# Altium PCB LdcPower.PcbDoc
Units mm, origin at the board's own origin, x right, y up, seen from the top; angles counter-clockwise.
Board outline 73.64 x 77.31 mm, 2 copper layers (Top Layer, Bottom Layer); 81 components, 38 nets, 243 pads, 156 vias.
Unrouted connection lines stored in the file: 40.
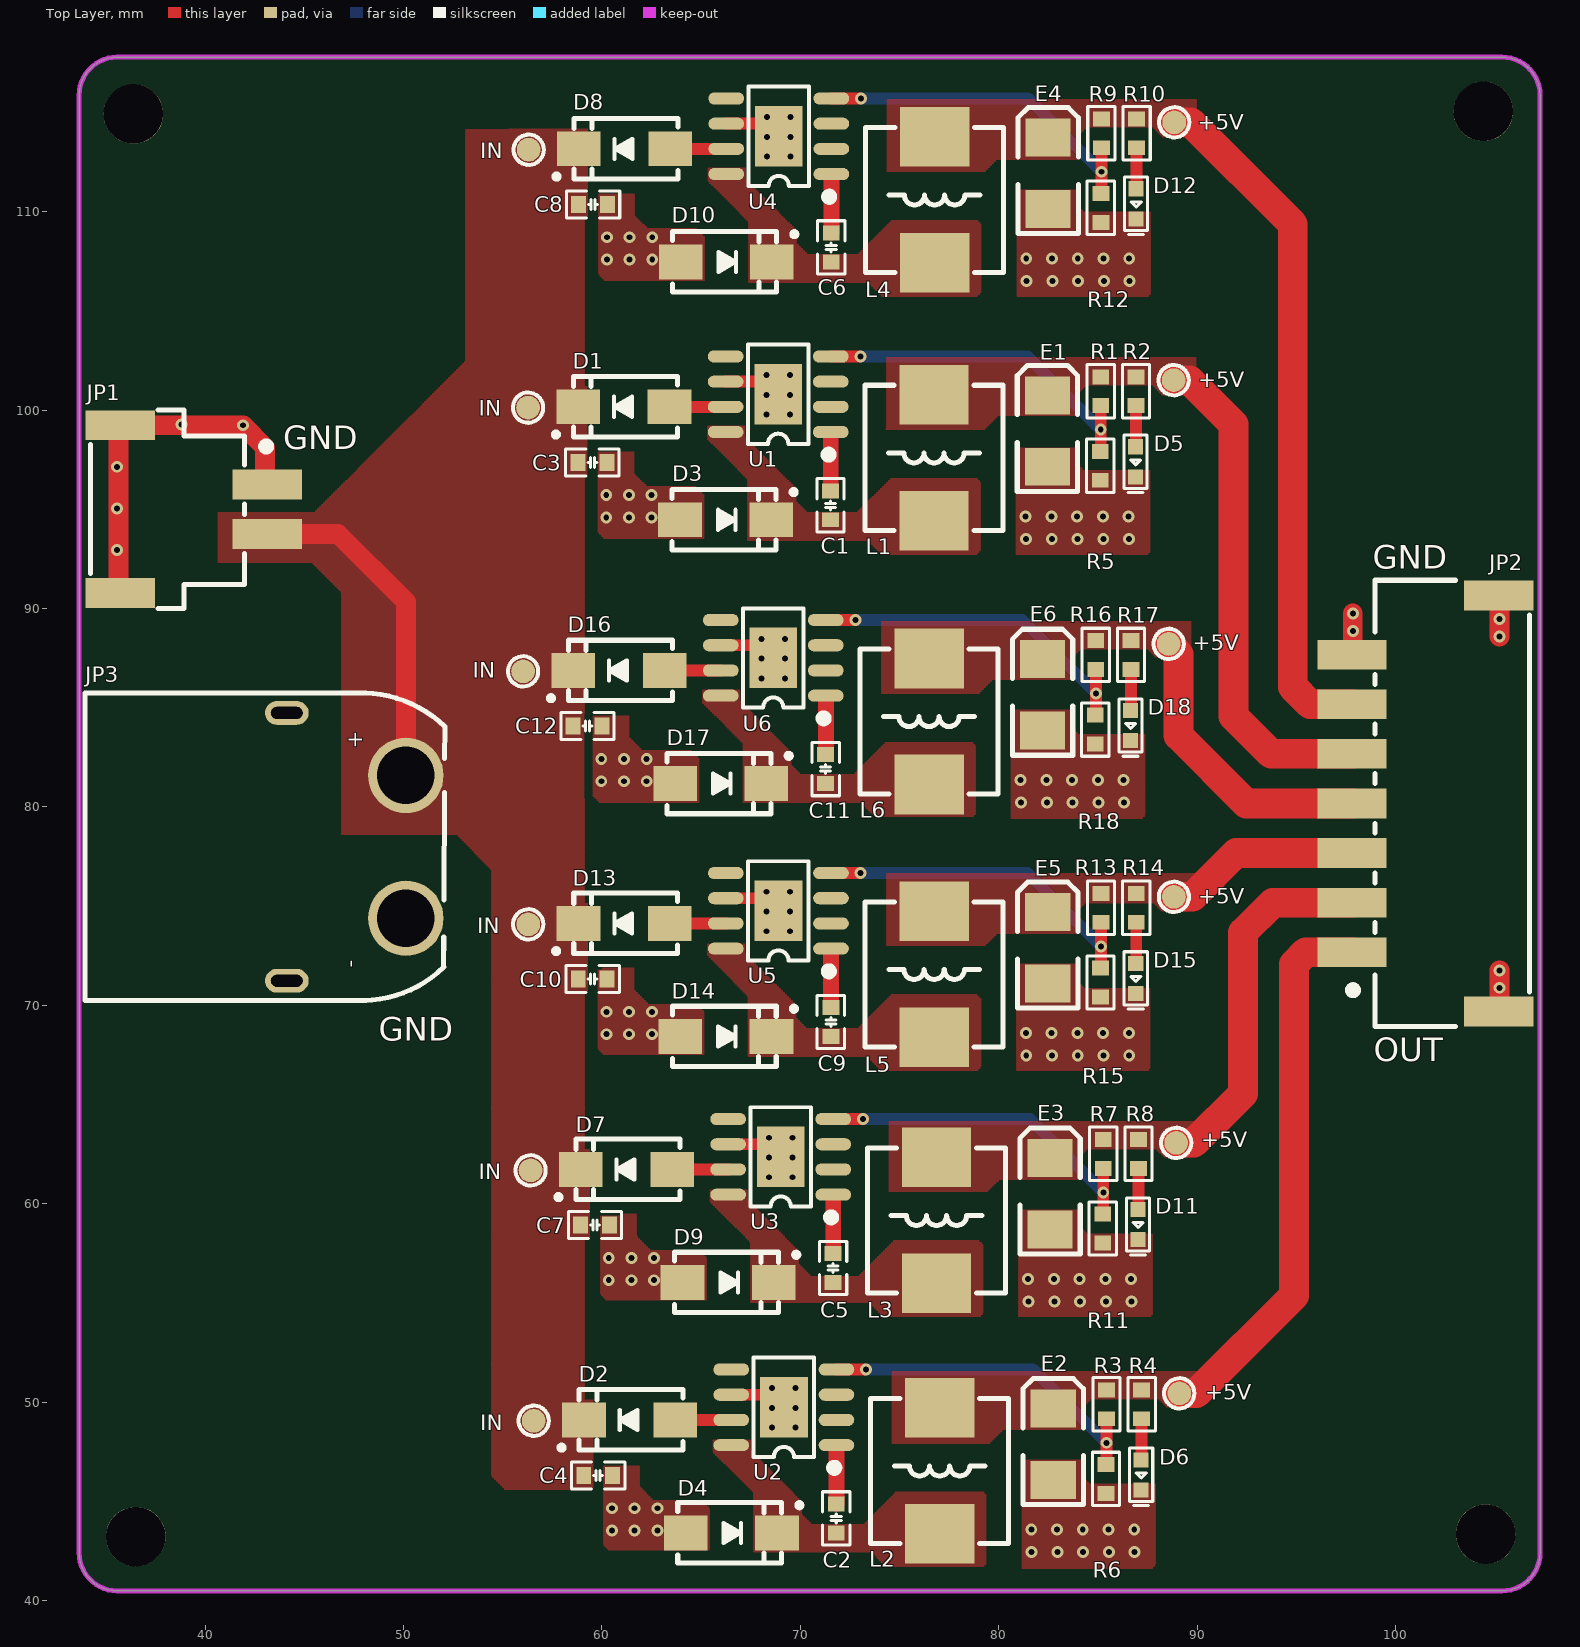
[diagram p0: Top Layer view]
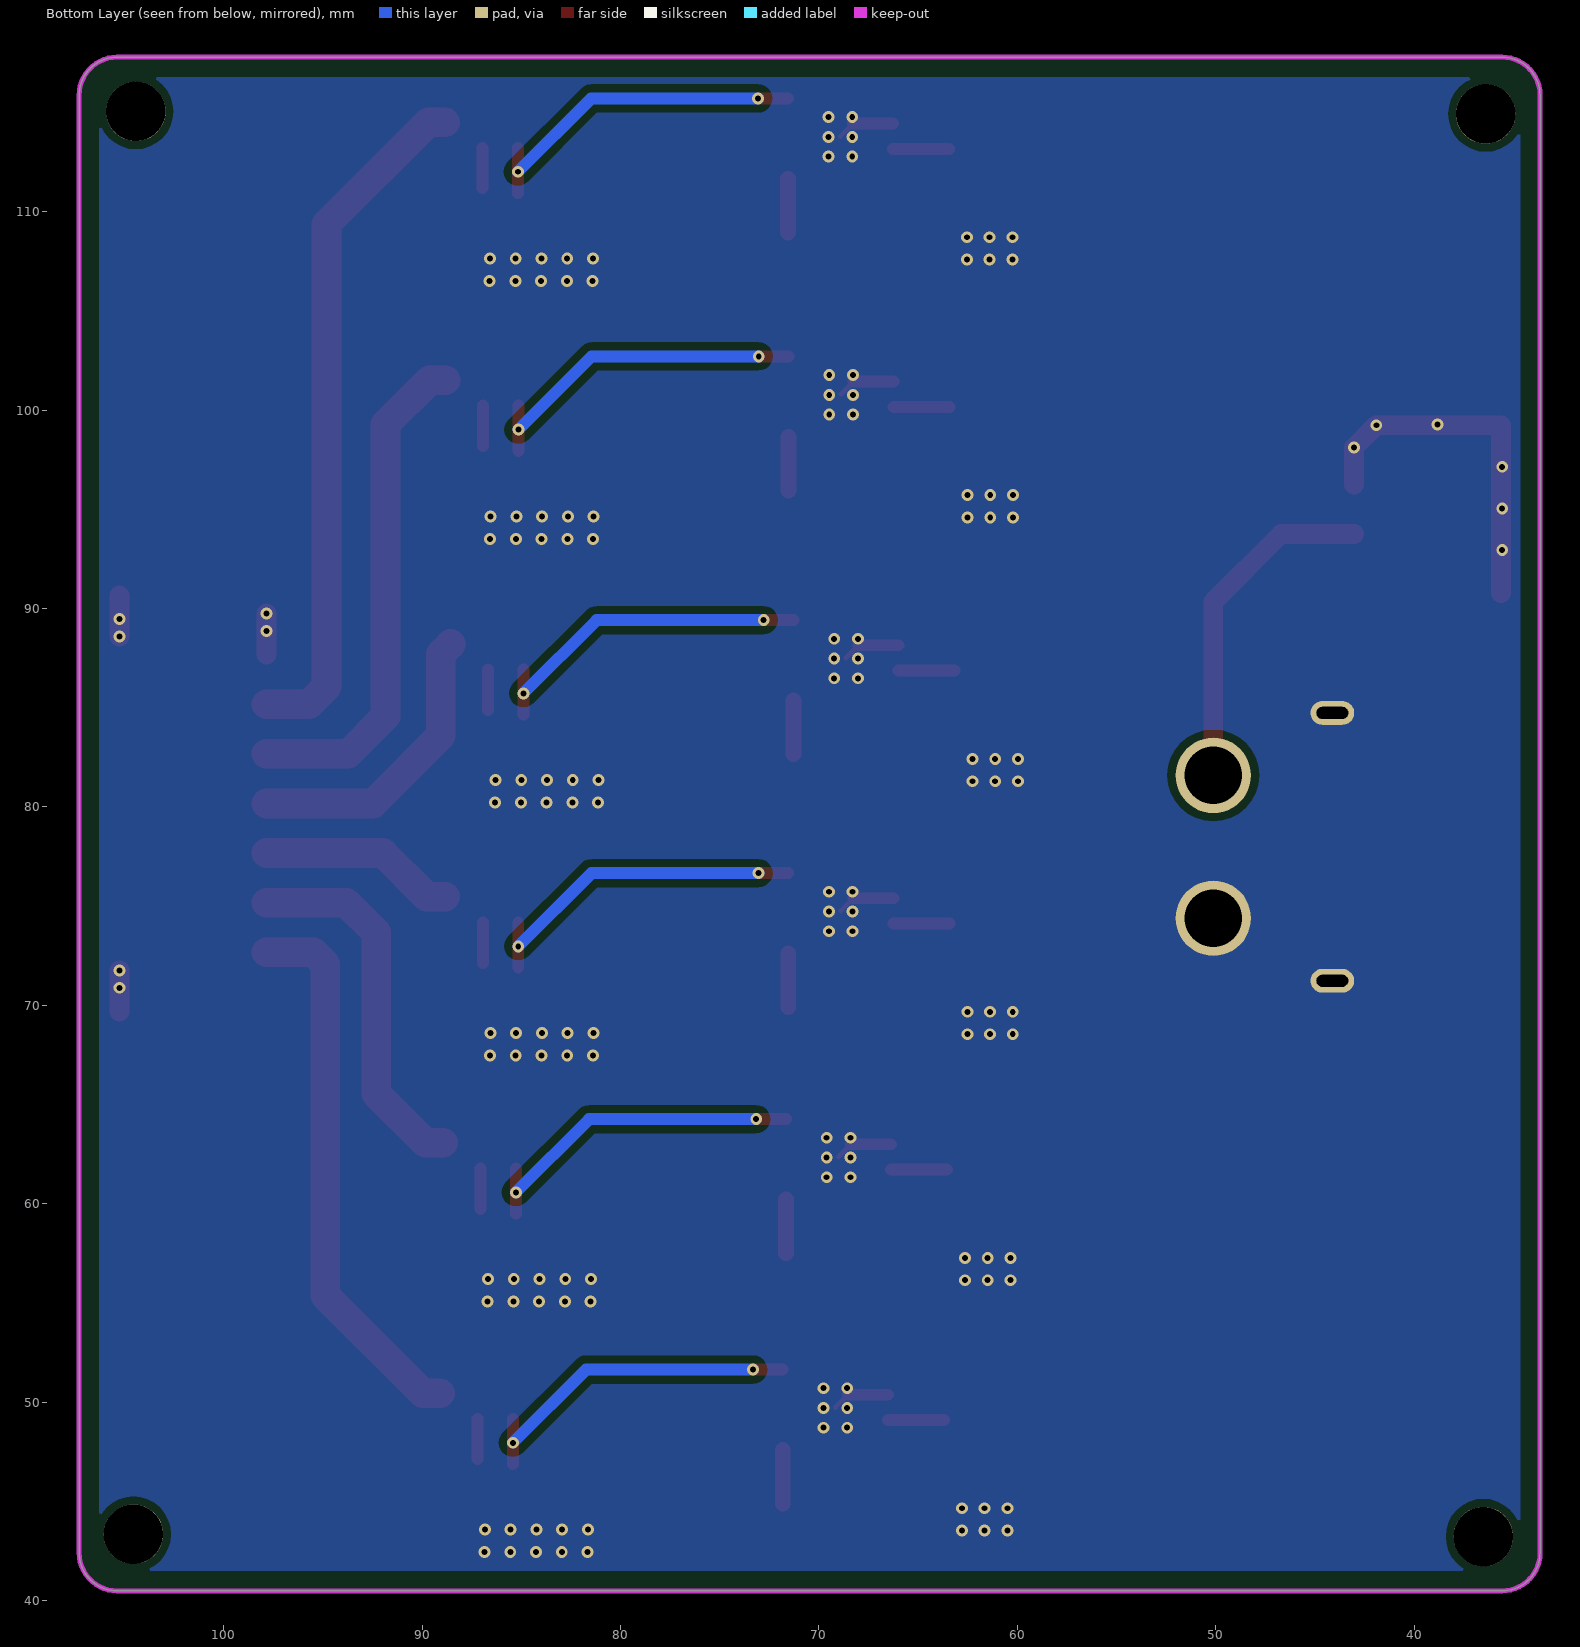
[diagram p1: Bottom Layer view, seen from below]
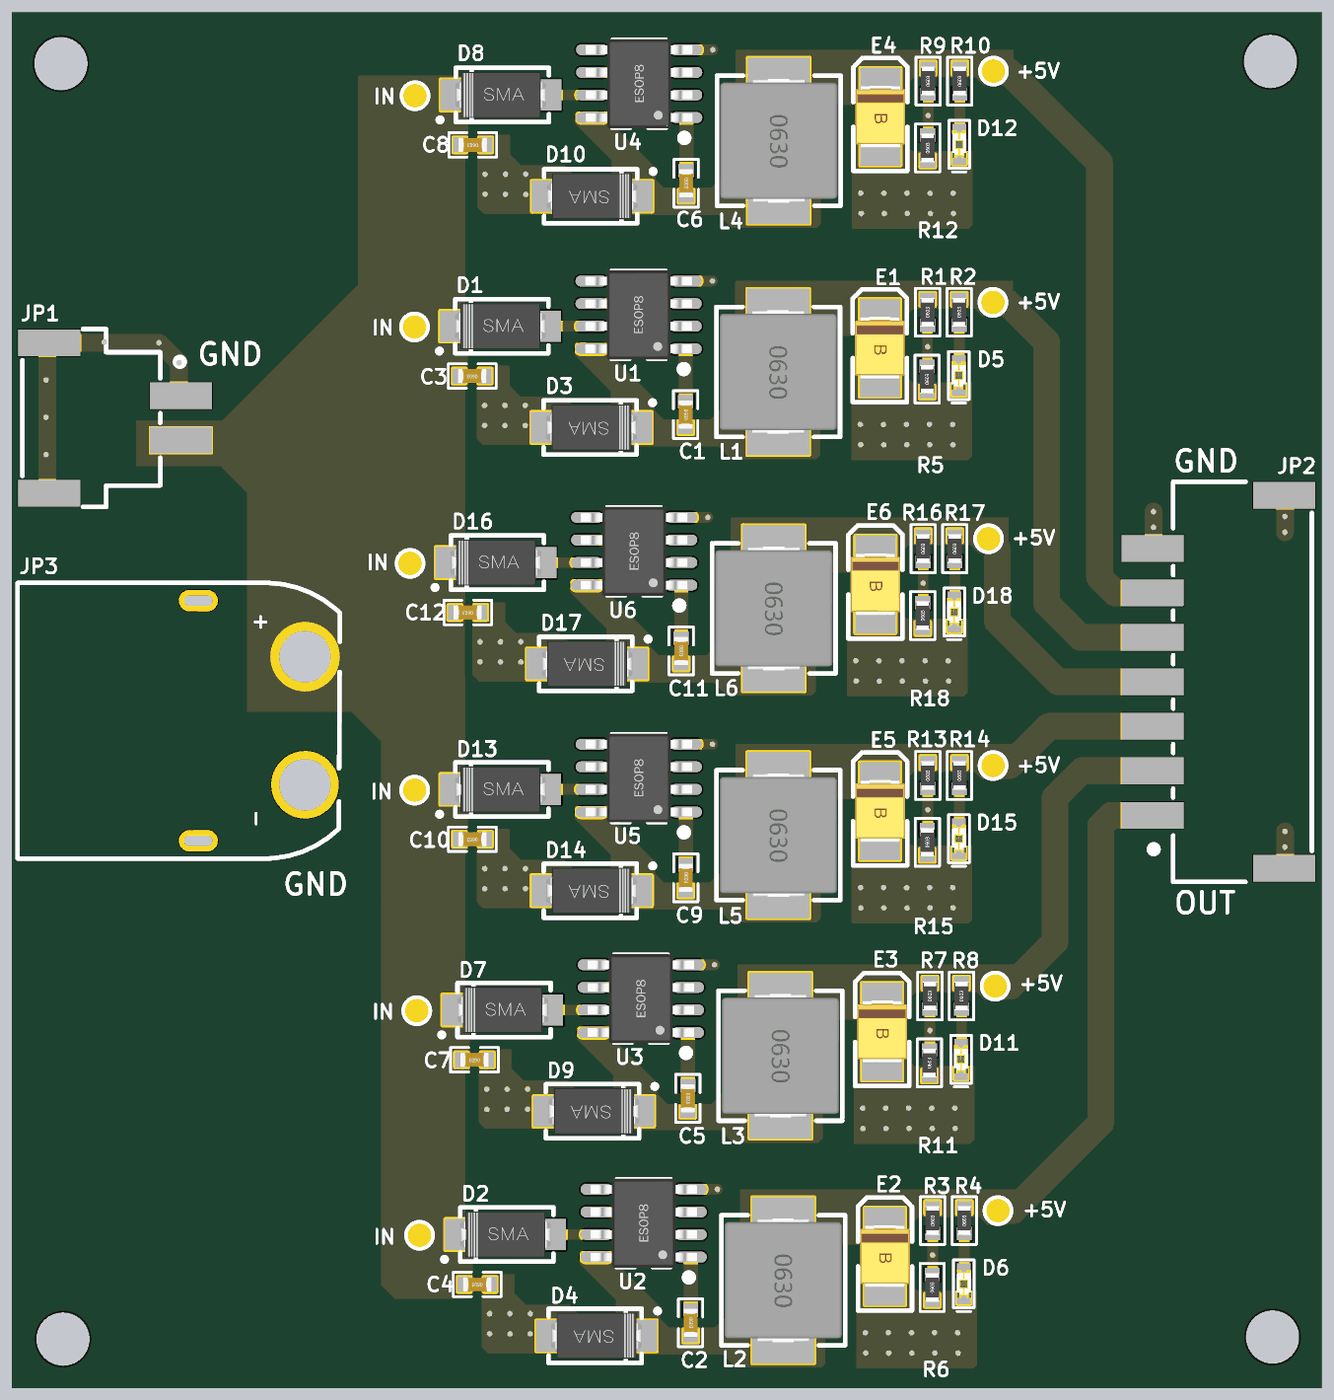
[diagram p2: 3D render of the assembled board from above, using the file's embedded part models]

## Layer stack, top to bottom
Top Solder: solder mask 0.0102, Solder Resist, Dk 3.5
Top Layer: signal copper 0.0356
Dielectric 1: dielectric 0.32, FR-4, Dk 4.8
Bottom Layer: signal copper 0.0356
Bottom Solder: solder mask 0.0102, Solder Resist, Dk 3.5

## Board outline
35.57,40.48 cw(c35.57,42.4) 33.65,42.4 33.65,115.87 33.651,115.87 cw(c35.57,115.87) 35.57,117.79 105.37,117.79 105.371,117.79 cw(c105.371,115.87) 107.29,115.87 107.29,42.4 cw(c105.37,42.4) 105.37,40.48

## Design rules (kind name [scope] priority, off if disabled: settings)
BoardOutlineClearance [All] p1: gap=1 ignorepadtopadclearanceinfootprint=FALSE
Clearance [All] p1: gap=0.2 ignorepadtopadclearanceinfootprint=TRUE except(0.4: Arc-Fill Arc-Poly Arc-Region Track-Fill Track-Poly Track-Region SMDPad-Fill SMDPad-Poly SMDPad-Region THPad-Fill THPad-Poly THPad-Region Fill-Fill Fill-Poly Fill-Region Poly-Poly Poly-Region Region-Region)
PolygonConnect [All] p1: connectstyle=Direct reliefconductorwidth=0.254 reliefentries=4 polygonreliefangle="90 Angle" airgapwidth=0.254
RoutingVias [All] p1: holewidth=0.711 width=1.27 viastyle="Through Hole" minholewidth=0.711 minwidth=1.27 maxholewidth=0.711 maxwidth=1.27
SolderMaskExpansion [All] p1: expansion=0.102 istentingtop=FALSE
Width [All] p1: maxlimit=0.254 minlimit=0.254 preferedwidth=0.254
30 further rules are at their usual default settings.

## Classes and differential pairs
component class "Room Definition 6": +5V C6 C8 D8 D10 D12 E4 IN L4 R9 R10 R12 U4
component class "Room Definition 5": +5V C1 C3 D1 D3 D5 E1 IN L1 R1 R2 R5 U1
component class "Room Definition 4": +5V C11 C12 D16 D17 D18 E6 IN L6 R16 R17 R18 U6
component class "Room Definition 3": +5V C9 C10 D13 D14 D15 E5 IN L5 R13 R14 R15 U5
component class "Room Definition 2": +5V C5 C7 D7 D9 D11 E3 IN L3 R7 R8 R11 U3
component class "Room Definition 1": +5V C2 C4 D2 D4 D6 E2 IN L2 R3 R4 R6 U2
component class LdcPower: C1 C2 C3 C4 C5 C6 C7 C8 C9 C10 C11 C12 D1 D2 D3 D4 D5 D6 D7 D8 D9 D10 D11 D12 D13 D14 D15 D16 D17 D18 E1 E2 E3 E4 E5 E6 L1 L2 L3 L4 L5 L6 R1 R2 R3 R4 R5 R6 R7 R8 R9 R10 R11 R12 R13 R14 R15 R16 R17 R18 U1 U2 U3 U4 U5 U6

## Components (designator, comment, footprint, x,y, rotation, side; value= is the part's Value field where it differs from the comment)
+5V "CS" "TEST 1.2" 88.57,88.214 r90 top (schematic designator *11)
+5V "CS" "TEST 1.2" 88.83,75.464 r90 top (schematic designator *9)
+5V "CS" "TEST 1.2" 88.85,114.504 r90 top (schematic designator *6)
+5V "CS" "TEST 1.2" 88.948,63.064 r90 top (schematic designator *5)
+5V "CS" "TEST 1.2" 89.104,50.441 r90 top (schematic designator *2)
+5V "CS" "TEST 1.2" 88.82,101.504 r90 top (schematic designator *1)
C1 "103" C0603_L 71.53,95.195 r270 top
C2 "103" C0603_L 71.814,44.131 r270 top
C3 "106" C0603_L 59.525,97.36 r180 top
C4 "106" C0603_L 59.809,46.296 r180 top
C5 "103" C0603_L 71.658,56.755 r270 top
C6 "103" C0603_L 71.56,108.195 r270 top
C7 "106" C0603_L 59.652,58.92 r180 top
C8 "106" C0603_L 59.555,110.36 r180 top
C9 "103" C0603_L 71.54,69.155 r270 top
C10 "106" C0603_L 59.535,71.32 r180 top
C11 "103" C0603_L 71.28,81.905 r270 top
C12 "106" C0603_L 59.275,84.07 r180 top
D1 "B340A" SMA 61.112,100.163 r180 top
D2 "B340A" SMA 61.396,49.099 r180 top
D3 "B340A" SMA 66.24,94.466 r0 top
D4 "B340A" SMA 66.524,43.402 r0 top
D5 "LED" LED0603_R 86.898,97.39 r270 top
D6 "LED" LED0603_R 87.182,46.326 r270 top
D7 "B340A" SMA 61.239,61.723 r180 top
D8 "B340A" SMA 61.142,113.163 r180 top
D9 "B340A" SMA 66.367,56.026 r0 top
D10 "B340A" SMA 66.27,107.466 r0 top
D11 "LED" LED0603_R 87.026,58.95 r270 top
D12 "LED" LED0603_R 86.928,110.39 r270 top
D13 "B340A" SMA 61.122,74.123 r180 top
D14 "B340A" SMA 66.25,68.426 r0 top
D15 "LED" LED0603_R 86.908,71.35 r270 top
D16 "B340A" SMA 60.862,86.873 r180 top
D17 "B340A" SMA 65.99,81.176 r0 top
D18 "LED" LED0603_R 86.648,84.1 r270 top
E1 "220uF/6.3V" C_3528 82.46,98.939 r270 top
E2 "220uF/6.3V" C_3528 82.744,47.875 r270 top
E3 "220uF/6.3V" C_3528 82.588,60.499 r270 top
E4 "220uF/6.3V" C_3528 82.49,111.939 r270 top
E5 "220uF/6.3V" C_3528 82.47,72.899 r270 top
E6 "220uF/6.3V" C_3528 82.21,85.649 r270 top
IN "CS" "TEST 1.2" 56.03,86.83 r0 top (schematic designator *12)
IN "CS" "TEST 1.2" 56.29,74.08 r0 top (schematic designator *10)
IN "CS" "TEST 1.2" 56.31,113.12 r0 top (schematic designator *8)
IN "CS" "TEST 1.2" 56.407,61.68 r0 top (schematic designator *7)
IN "CS" "TEST 1.2" 56.564,49.056 r0 top (schematic designator *4)
IN "CS" "TEST 1.2" 56.28,100.12 r0 top (schematic designator *3)
JP1 "HDR-1X2" CONN-SMD_2P-P2.54_MEGASTAR_ZX-XH2.54-2PWT 39.429,95.002 r270 top (schematic designator JP3)
JP2 "HDR-1X7" CONN-SMD_7P-P2.54_MEGASTAR_ZX-XH2.54-7PWT 101.51,80.17 r90 top
JP3 "HDR-1X2" CONN-TH_XT60PW-M 47.121,77.984 r0 top (schematic designator JP1)
L1 "15uH" L-SMD-0630 76.74,97.591 r270 top
L2 "15uH" L-SMD-0630 77.024,46.528 r270 top
L3 "15uH" L-SMD-0630 76.867,59.151 r270 top
L4 "15uH" L-SMD-0630 76.77,110.591 r270 top
L5 "15uH" L-SMD-0630 76.75,71.551 r270 top
L6 "15uH" L-SMD-0630 76.49,84.301 r270 top
R1 "10K" R0603_L 85.146,100.946 r90 top
R2 "1K" R0603_L 86.924,100.946 r90 top
R3 "10K" R0603_L 85.43,49.882 r90 top
R4 "1K" R0603_L 87.208,49.882 r90 top
R5 "3.24K" R0603_L 85.12,97.186 r90 top
R6 "3.24K" R0603_L 85.404,46.123 r90 top
R7 "10K" R0603_L 85.273,62.506 r90 top
R8 "1K" R0603_L 87.051,62.506 r90 top
R9 "10K" R0603_L 85.176,113.946 r90 top
R10 "1K" R0603_L 86.954,113.946 r90 top
R11 "3.24K" R0603_L 85.248,58.746 r90 top
R12 "3.24K" R0603_L 85.15,110.186 r90 top
R13 "10K" R0603_L 85.156,74.906 r90 top
R14 "1K" R0603_L 86.934,74.906 r90 top
R15 "3.24K" R0603_L 85.13,71.146 r90 top
R16 "10K" R0603_L 84.896,87.656 r90 top
R17 "1K" R0603_L 86.674,87.656 r90 top
R18 "3.24K" R0603_L 84.87,83.896 r90 top
U1 "TPS5430DDAR" SOIC-8_EP 68.888,100.798 r180 top
U2 "TPS5430DDAR" SOIC-8_EP 69.172,49.734 r180 top
U3 "TPS5430DDAR" SOIC-8_EP 69.016,62.358 r180 top
U4 "TPS5430DDAR" SOIC-8_EP 68.918,113.798 r180 top
U5 "TPS5430DDAR" SOIC-8_EP 68.898,74.758 r180 top
U6 "TPS5430DDAR" SOIC-8_EP 68.638,87.508 r180 top

## Footprints (in the part's own frame and the unit in brackets; to place one, negate y for a bottom-side part, rotate by r counter-clockwise, add the part's x,y. Pads: shape width x height; smd on the part's side, far side on the other; paste and mask are expansions set on the pad)
C0603_L [mm] "贴片MLCC电容"
  rect 0.75x0.85 smd: 1(-0.725,0) 2(0.725,0)
  silkscreen extent -1.35,-0.69 1.35,0.69, body extent -0.8,-0.4 0.8,0.4, height 0.8
C_3528 [mil]
  rect 75x90 smd: 1(-70.87,-0.01) 2(70.86,-0.01)
  silkscreen extent -130,-60 120,60, body extent -69,-55 69,55, height 76
CONN-SMD_2P-P2.54_MEGASTAR_ZX-XH2.54-2PWT [mm]
  rect 1.5x3.5 smd paste+0 mask+0.05: 1(-1.25,3.7) 2(1.25,3.7) 3(-4.23,-3.7) 4(4.23,-3.7)
  silkscreen extent -5,-5.21 5,3.85
CONN-SMD_7P-P2.54_MEGASTAR_ZX-XH2.54-7PWT [mm]
  rect 1.5x3.5 smd paste+0 mask+0.05: 1(-7.5,3.7) 2(-5,3.7) 3(-2.5,3.7) 4(0,3.7) 5(2.5,3.7) 6(5,3.7) 7(7.5,3.7) 8(10.48,-3.7) 9(-10.48,-3.7)
  silkscreen extent -11.25,-5.25 11.25,3.85
CONN-TH_XT60PW-M [mm]
  round 3.8 hole 2.9 paste+0 mask+0.05: 1(3,-3.6) 2(3,3.6)
  oval 2.2x1.2 hole 0.6 slot 1.6 at 0 deg paste+0 mask+0.05: 3(-3,6.75) 4(-3,-6.75)
  silkscreen extent -13.17,-7.75 4.96,7.75
L-SMD-0630 [mm]
  rect 3x3.5 smd: 1(-3.175,0) 2(3.175,0)
  silkscreen extent -3.66,-3.48 3.66,3.48, body extent -3.47,-3.3 3.48,3.3
LED0603_R [mil] "红色0603LED"
  rect 30x30 smd: 1(-30,0) 2(30,0)
  silkscreen extent -53,-23 61,23, body extent -31,-16 32,16, height 18
R0603_L [mm] "1/10W贴片电阻"
  rect 0.75x0.85 smd: 1(-0.725,0) 2(0.725,0)
  silkscreen extent -1.35,-0.69 1.35,0.69, body extent -0.8,-0.4 0.8,0.4, height 0.4
SMA [mm]
  rect 2.2x1.75 smd: 1(-2.3,0) 2(2.3,0)
  silkscreen extent -2.7,-1.52 3.56,1.52, body extent -2.55,-1.3 2.55,1.3, height 2.15
SOIC-8_EP [mm]
  oval 1.8x0.61 smd: 1(-2.65,1.905) 2(-2.65,0.635) 3(-2.65,-0.635) 4(-2.65,-1.905) 5(2.65,-1.905) 6(2.65,-0.635) 7(2.65,0.635) 8(2.65,1.905)
  rect 2.413x3.048 smd paste-2: 9(0,0)
  rect 0.9x0.7 on Top Paste: 10(-0.625,1.1) 10(-0.625,0) 10(-0.625,-1.1) 11(0.65,1.1) 11(0.65,0) 11(0.65,-1.1)
  silkscreen extent -2.69,-2.5 1.52,3.2, body extent -3,-2.5 3,2.5, height 1.53
"TEST 1.2" [mm]
  round 1.2 smd paste-1.2: 1(0,0)
  silkscreen extent -0.76,-0.76 0.76,0.76

## Part data
+5V +5V +5V +5V +5V +5V IN IN IN IN IN IN: "探针焊盘", BOM名称=?
C1 C2 C3 C4 C5 C6 C7 C8 C9 C10 C11 C12: library part C, "贴片电容/MLCC电容", BOM名称=无
D1 D2 D3 D4 D7 D8 D9 D10 D13 D14 D16 D17: library part D-Schottky, "肖特基二极管", 当前库版本V2023.10.25 @淘宝卖家:黄晶宝石=最新版本发布https://ite
D5 D6 D11 D12 D15 D18: library part LED0, "发光二极管", LatestRevisionDate=08-Jul-2005, LatestRevisionNote="Mech Layer 1 removed.", PackageReference=LED-0, Published=8-Jun-2000, Publisher="Altium Limited"
E1 E2 E3 E4 E5 E6: library part CT, "贴片钽电容", BOM名称=?, 当前库版本V2023.10.25 @淘宝卖家:黄晶宝石=最新版本发布https://ite
JP1 JP3: library part "Header 2", "2P接插件", BOM名称=2P, 联系卖家，免费查找封装=唯一出售店
JP2: library part "Header 7", "7P接插件", BOM名称=7P, 联系卖家，免费查找封装=唯一出售店
L1 L2 L3 L4 L5 L6: library part "L-Molding Choke", "一体成型电感", BOM名称=一, 当前库版本V2023.10.25 @淘宝卖家:黄晶宝石=最新版本发布https://ite
R1 R2 R3 R4 R5 R6 R7 R8 R9 R10 R11 R12 R13 R14 R15 R16 R17 R18: library part R, "贴片电阻", BOM名称=?
U1 U2 U3 U4 U5 U6: Symbol=TPS5430DDAR

## Free pads (board coordinates)
  round 3 hole 3 unplated: 2(36.391,114.923) 2(36.507,43.221) 2(104.433,115.049) 2(104.549,43.337)

## Via types
v1: diameter 0.6, hole 0.3, Top Layer to Bottom Layer, tented both sides, 156 vias

## Nets (pads, with @x,y where several pads share a name; then routed paths per layer and width w, separated by ;. In a path a pad name is that pad's centre, name@x,y a point inside that pad or via, vN(x,y) a via of type N, cw(c..) or ccw(c..) an arc to the next point about the centre after c; other vN are vias at no path point)
+5V_1: +5V.1@89.104,50.441 E2.1 JP2.1 L2.1 R3.2 R4.2 | length 27.7
  Top Layer w1.5: +5V.1@89.104,50.441 89.961,50.441 94.88,55.36 94.88,72.07 95.48,72.67 JP2.1 JP2.1@97.85,72.67
+5V_2: +5V.1@88.948,63.064 E3.1 JP2.2 L3.1 R7.2 R8.2 | length 18.7
  Top Layer w1.5: +5V.1@88.948,63.064 89.834,63.064 92.31,65.54 92.31,73.66 93.82,75.17 JP2.2 JP2.2@97.85,75.17
+5V_3: +5V.1@88.83,75.464 E5.1 JP2.3 L5.1 R13.2 R14.2 | length 9.9
  Top Layer w1.5: +5V.1@88.83,75.464 89.764,75.464 91.97,77.67 JP2.3 JP2.3@97.85,77.67
+5V_4: +5V.1@88.57,88.214 E6.1 JP2.4 L6.1 R16.2 R17.2 | length 15
  Top Layer w1.5: +5V.1@88.57,88.214 88.57,88.18 89.06,87.69 89.06,83.59 92.48,80.17 JP2.4 JP2.4@97.85,80.17
+5V_5: +5V.1@88.82,101.504 E1.1 JP2.5 L1.1 R1.2 R2.2 | length 25.4
  Top Layer w1.5: +5V.1@88.82,101.504 89.616,101.504 91.84,99.28 91.84,84.57 93.74,82.67 JP2.5 JP2.5@97.85,82.67
+5V_6: +5V.1@88.85,114.504 E4.1 JP2.6 L4.1 R9.2 R10.2 | length 34.8
  Top Layer w1.5: +5V.1@88.85,114.504 89.686,114.504 94.82,109.37 94.82,86.05 95.7,85.17 JP2.6 JP2.6@97.85,85.17
GND: C3.1 C4.1 C7.1 C8.1 C10.1 C12.1 D3.1 D4.1 D5.2 D6.2 D9.1 D10.1 D11.2 D12.2 D14.1 D15.2 D17.1 D18.2 E1.2 E2.2 E3.2 E4.2 E5.2 E6.2 JP1.1 JP1.3 JP1.4 JP2.7 JP2.8 JP2.9 JP3.1 JP3.3 JP3.4 R5.1 R6.1 R11.1 R12.1 R15.1 R18.1 U1.6 U1.9 U2.6 U2.9 U3.6 U3.9 U4.6 U4.9 U5.6 U5.9 U6.6 U6.9 | length 43.4
  Top Layer w0.254: U6.9@68.003,88.143 U6.9 ; U1.9@68.253,101.433 U1.9 ; U5.9@68.263,75.393 U5.9 ; U4.9@68.283,114.433 U4.9 ; U3.9@68.381,62.993 U3.9 ; U2.9@68.537,50.369 U2.9 ; JP2.7@97.85,87.67 v1@97.85,89.16
  Top Layer w0.6: U6.6 U6.9@68.003,88.143 ; U1.6 U1.9@68.253,101.433 ; U5.6 U5.9@68.263,75.393 ; U4.6 U4.9@68.283,114.433 ; U3.6 U3.9@68.381,62.993 ; U2.6 U2.9@68.537,50.369
  Top Layer w1: JP1.4@35.629,90.772 35.629,99.232 v1(41.908,99.232) v1(43.029,98.111) JP1.1@43.029,96.252 ; JP2.7@97.85,87.67 v1(97.85,89.74) ; JP2.9@105.25,69.69 v1(105.25,71.76) ; v1(105.25,88.58) JP2.8@105.25,90.65
  other v1: 81.664,42.436 82.961,42.436 84.259,42.436 85.556,42.436 86.854,42.436 60.504,43.516 61.649,43.516 62.794,43.516 81.644,43.579 82.941,43.579 84.239,43.579 85.536,43.579 86.834,43.579 60.504,44.646 61.649,44.646 62.794,44.646 68.574,48.706 69.764,48.706 68.574,49.701 69.764,49.701 68.574,50.696 69.764,50.696 81.508,55.06 82.805,55.06 84.103,55.06 85.4,55.06 86.698,55.06 60.348,56.14 61.493,56.14 62.637,56.14 81.488,56.203 82.785,56.203 84.083,56.203 85.38,56.203 86.678,56.203 60.348,57.27 61.493,57.27 62.637,57.27 68.418,61.33 69.608,61.33 68.418,62.325 69.608,62.325 68.418,63.32 69.608,63.32 81.39,67.46 82.688,67.46 83.985,67.46 85.283,67.46 86.58,67.46 60.23,68.54 61.375,68.54 62.52,68.54 81.37,68.603 82.668,68.603 83.965,68.603 85.263,68.603 86.56,68.603 60.23,69.67 61.375,69.67 62.52,69.67 105.25,70.88 68.3,73.73 69.49,73.73 68.3,74.725 69.49,74.725 68.3,75.72 69.49,75.72 81.13,80.21 82.427,80.21 83.725,80.21 85.022,80.21 86.32,80.21 59.97,81.29 61.115,81.29 62.26,81.29 81.11,81.353 82.407,81.353 83.705,81.353 85.002,81.353 86.3,81.353 59.97,82.42 61.115,82.42 62.26,82.42 68.04,86.48 69.23,86.48 68.04,87.475 69.23,87.475 68.04,88.47 69.23,88.47 97.85,88.86 105.25,89.46 35.56,92.94 81.38,93.5 82.678,93.5 83.975,93.5 85.273,93.5 86.57,93.5 60.22,94.58 61.365,94.58 62.51,94.58 81.36,94.643 82.658,94.643 83.955,94.643 85.253,94.643 86.55,94.643 35.56,95.04 60.22,95.71 61.365,95.71 62.51,95.71 35.56,97.14 38.82,99.27 68.29,99.77 69.48,99.77 68.29,100.765 69.48,100.765 68.29,101.76 69.48,101.76 81.41,106.5 82.708,106.5 84.005,106.5 85.303,106.5 86.6,106.5 60.25,107.58 61.395,107.58 62.54,107.58 81.39,107.643 82.688,107.643 83.985,107.643 85.283,107.643 86.58,107.643 60.25,108.71 61.395,108.71 62.54,108.71 68.32,112.77 69.51,112.77 68.32,113.765 69.51,113.765 68.32,114.76 69.51,114.76
Net*3_1: C3.2 C4.2 C7.2 C8.2 C10.2 C12.2 D1.2 D2.2 D7.2 D8.2 D13.2 D16.2 IN.1 JP1.2 JP3.2 | length 17.3
  Top Layer w1: JP1.2@43.029,93.752 JP1.2 46.708,93.752 50.121,90.339 JP3.2
NetC1_1: C1.1 U1.1 | length 2.7
  Top Layer w0.254: C1.1@71.51,95.92 C1.1@71.538,95.948
  Top Layer w0.8: C1.1@71.538,95.948 U1.1@71.538,98.65
NetC1_2: C1.2 D3.2 L1.2 U1.8
NetC2_1: C2.1 U2.1 | length 2.7
  Top Layer w0.254: C2.1@71.794,44.856 C2.1@71.822,44.884
  Top Layer w0.8: C2.1@71.822,44.884 U2.1@71.822,47.586
NetC2_2: C2.2 D4.2 L2.2 U2.8
NetC5_1: C5.1 U3.1 | length 2.7
  Top Layer w0.254: C5.1@71.638,57.48 C5.1@71.666,57.508
  Top Layer w0.8: C5.1@71.666,57.508 U3.1@71.666,60.21
NetC5_2: C5.2 D9.2 L3.2 U3.8
NetC6_1: C6.1 U4.1 | length 2.7
  Top Layer w0.254: C6.1@71.54,108.92 C6.1@71.568,108.948
  Top Layer w0.8: C6.1@71.568,108.948 U4.1@71.568,111.65
NetC6_2: C6.2 D10.2 L4.2 U4.8
NetC9_1: C9.1 U5.1 | length 2.7
  Top Layer w0.254: C9.1@71.52,69.88 C9.1@71.548,69.908
  Top Layer w0.8: C9.1@71.548,69.908 U5.1@71.548,72.61
NetC9_2: C9.2 D14.2 L5.2 U5.8
NetC11_1: C11.1 U6.1 | length 2.7
  Top Layer w0.254: C11.1@71.26,82.63 C11.1@71.288,82.658
  Top Layer w0.8: C11.1@71.288,82.658 U6.1@71.288,85.36
NetC11_2: C11.2 D17.2 L6.2 U6.8
NetD1_1: D1.1 U1.7 | length 2.8
  Top Layer w0.6: D1.1 U1.7
NetD2_1: D2.1 U2.7 | length 2.8
  Top Layer w0.6: D2.1 U2.7
NetD5_1: D5.1 R2.1 | length 2.1
  Top Layer w0.254: D5.1 D5.1@86.924,98.178
  Top Layer w0.6: D5.1@86.924,98.178 R2.1
NetD6_1: D6.1 R4.1 | length 2.1
  Top Layer w0.254: D6.1 D6.1@87.208,47.114
  Top Layer w0.6: D6.1@87.208,47.114 R4.1
NetD7_1: D7.1 U3.7 | length 2.8
  Top Layer w0.6: D7.1 U3.7
NetD8_1: D8.1 U4.7 | length 2.8
  Top Layer w0.6: D8.1 U4.7
NetD11_1: D11.1 R8.1 | length 2.1
  Top Layer w0.254: D11.1 D11.1@87.051,59.738
  Top Layer w0.6: D11.1@87.051,59.738 R8.1
NetD12_1: D12.1 R10.1 | length 2.1
  Top Layer w0.254: D12.1 D12.1@86.954,111.178
  Top Layer w0.6: D12.1@86.954,111.178 R10.1
NetD13_1: D13.1 U5.7 | length 2.8
  Top Layer w0.6: D13.1 U5.7
NetD15_1: D15.1 R14.1 | length 2.1
  Top Layer w0.254: D15.1 D15.1@86.934,72.138
  Top Layer w0.6: D15.1@86.934,72.138 R14.1
NetD16_1: D16.1 U6.7 | length 2.8
  Top Layer w0.6: D16.1 U6.7
NetD18_1: D18.1 R17.1 | length 2.1
  Top Layer w0.254: D18.1 D18.1@86.674,84.888
  Top Layer w0.6: D18.1@86.674,84.888 R17.1
NetR1_1: R1.1 R5.2 U1.4 | length 17.5
  Top Layer w0.254: R5.2 R5.2@85.146,97.937
  Top Layer w0.6: U1.4 v1(73.033,102.703) ; R5.2@85.146,97.937 v1(85.146,99.01) R1.1
  Bottom Layer w0.6: v1(73.033,102.703) 81.453,102.703 v1(85.146,99.01)
NetR3_1: R3.1 R6.2 U2.4 | length 17.5
  Top Layer w0.254: R6.2 R6.2@85.43,46.874
  Top Layer w0.6: U2.4 v1(73.317,51.639) ; R6.2@85.43,46.874 v1(85.43,47.946) R3.1
  Bottom Layer w0.6: v1(73.317,51.639) 81.737,51.639 v1(85.43,47.946)
NetR7_1: R7.1 R11.2 U3.4 | length 17.5
  Top Layer w0.254: R11.2 R11.2@85.273,59.497
  Top Layer w0.6: U3.4 v1(73.161,64.263) ; R11.2@85.273,59.497 v1(85.273,60.57) R7.1
  Bottom Layer w0.6: v1(73.161,64.263) 81.58,64.263 v1(85.273,60.57)
NetR9_1: R9.1 R12.2 U4.4 | length 17.5
  Top Layer w0.254: R12.2 R12.2@85.176,110.937
  Top Layer w0.6: U4.4 v1(73.063,115.703) ; R12.2@85.176,110.937 v1(85.176,112.01) R9.1
  Bottom Layer w0.6: v1(73.063,115.703) 81.483,115.703 v1(85.176,112.01)
NetR13_1: R13.1 R15.2 U5.4 | length 17.5
  Top Layer w0.254: R15.2 R15.2@85.156,71.897
  Top Layer w0.6: U5.4 v1(73.043,76.663) ; R15.2@85.156,71.897 v1(85.156,72.97) R13.1
  Bottom Layer w0.6: v1(73.043,76.663) 81.463,76.663 v1(85.156,72.97)
NetR16_1: R16.1 R18.2 U6.4 | length 17.5
  Top Layer w0.254: R18.2 R18.2@84.896,84.647
  Top Layer w0.6: U6.4 v1(72.783,89.413) ; R18.2@84.896,84.647 v1(84.896,85.72) R16.1
  Bottom Layer w0.6: v1(72.783,89.413) 81.203,89.413 v1(84.896,85.72)
pads on no net: U1.2 U1.3 U1.5 U1.10 U1.11 U2.2 U2.3 U2.5 U2.10 U2.11 U3.2 U3.3 U3.5 U3.10 U3.11 U4.2 U4.3 U4.5 U4.10 U4.11 U5.2 U5.3 U5.5 U5.10 U5.11 U6.2 U6.3 U6.5 U6.10 U6.11

## Polygon pours and split planes (outlines as drawn)
Net*3_1 on Top Layer "Top Layer-Net*3_1" (hatched Horizontal grid 0.102 track 0.127, remove dead copper, pour order 70): 58.55,114.19 59.084,113.656 59.084,45.55 55.2,45.55 54.47,46.28 54.47,76.85 52.78,78.54 46.92,78.54 46.92,90.8 45.37,92.35 40.68,92.35 40.68,94.8 45.51,94.8 46.52,95.81 53.17,102.46 53.17,114.19
+5V_6 on Top Layer "Top Layer-+5V_6" (hatched Horizontal grid 0.102 track 0.127, remove dead copper, pour order 69): 89.4,113.78 88.28,113.78 87.856,114.204 84.354,114.204 83.91,113.76 83.91,112.67 79.91,112.67 79.25,112.01 74.4,112.01 74.41,112.4 74.41,115.65 89.93,115.65 89.93,114.31
+5V_5 on Top Layer "Top Layer-+5V_5" (hatched Horizontal grid 0.102 track 0.127, remove dead copper, pour order 68): 89.37,100.78 88.25,100.78 87.826,101.204 84.324,101.204 83.88,100.76 83.88,99.67 79.88,99.67 79.22,99.01 74.37,99.01 74.38,99.4 74.38,102.65 89.9,102.65 89.9,101.31
+5V_4 on Top Layer "Top Layer-+5V_4" (hatched Horizontal grid 0.102 track 0.127, remove dead copper, pour order 67): 89.12,87.49 88,87.49 87.576,87.914 84.074,87.914 83.63,87.47 83.63,86.38 79.63,86.38 78.97,85.72 74.12,85.72 74.13,86.11 74.13,89.36 89.65,89.36 89.65,88.02
+5V_3 on Top Layer "Top Layer-+5V_3" (hatched Horizontal grid 0.102 track 0.127, remove dead copper, pour order 66): 89.38,74.74 88.26,74.74 87.836,75.164 84.334,75.164 83.89,74.72 83.89,73.63 79.89,73.63 79.23,72.97 74.38,72.97 74.39,73.36 74.39,76.61 89.91,76.61 89.91,75.27
+5V_2 on Top Layer "Top Layer-+5V_2" (hatched Horizontal grid 0.102 track 0.127, remove dead copper, pour order 65): 89.497,62.34 88.378,62.34 87.954,62.764 84.451,62.764 84.008,62.32 84.008,61.23 80.008,61.23 79.348,60.57 74.498,60.57 74.508,60.96 74.507,64.21 90.028,64.21 90.028,62.87
GND on Top Layer "Top Layer-GND" (hatched Horizontal grid 0.102 track 0.127, remove dead copper, pour order 64): 81.048,59.69 81.048,54.26 87.548,54.26 87.718,54.43 87.718,58.514 84.364,58.514 84.027,58.85 84.028,59.69
GND on Top Layer "Top Layer-GND 1" (hatched Horizontal grid 0.102 track 0.127, remove dead copper, pour order 63): 80.93,72.09 80.93,66.66 87.43,66.66 87.6,66.83 87.6,70.914 84.246,70.914 83.91,71.25 83.91,72.09
GND on Top Layer "Top Layer-GND 2" (hatched Horizontal grid 0.102 track 0.127, remove dead copper, pour order 62): 80.67,84.84 80.67,79.41 87.17,79.41 87.34,79.58 87.34,83.664 83.986,83.664 83.65,84 83.65,84.84
GND on Top Layer "Top Layer-GND 3" (hatched Horizontal grid 0.102 track 0.127, remove dead copper, pour order 61): 80.92,98.13 80.92,92.7 87.42,92.7 87.59,92.87 87.59,96.954 84.236,96.954 83.9,97.29 83.9,98.13
GND on Top Layer "Top Layer-GND 4" (hatched Horizontal grid 0.102 track 0.127, remove dead copper, pour order 60): 80.95,111.13 80.95,105.7 87.45,105.7 87.62,105.87 87.62,109.954 84.266,109.954 83.93,110.29 83.93,111.13
Net*3_1 on Top Layer "Top Layer-Net*3_1 1" (solid, remove dead copper, pour order 45): 57.89,109.82 57.985,109.725 58.09,109.62 59.18,109.62 59.3,109.74 59.3,114.19 55.31,114.19 55.3,114.18 55.29,111.98 56.118,111.152 57.89,111.152
GND on Top Layer "Top Layer-GND 5" (hatched Horizontal grid 0.102 track 0.127, remove dead copper, pour order 51): 60.19,106.54 59.87,106.86 59.87,110.87 61.6,110.88 61.6,109.82 62.28,109.14 64.71,109.14 65.13,108.72 65.13,106.54
NetC6_2 on Top Layer "Top Layer-NetC6_2" (hatched Horizontal grid 0.102 track 0.127, remove dead copper, pour order 57): 65.39,111.54 65.39,112.17 67.2,112.17 67.2,111.63 68.57,110.26 69.77,109.06 69.77,108.41 70.29,107.89 72.98,107.89 74.65,109.56 78.88,109.56 79.08,109.36 79.08,105.94 78.89,105.75 74.14,105.75 73.42,106.47 67.42,106.47 67.42,109.51
Net*3_1 on Top Layer "Top Layer-Net*3_1 2" (solid, remove dead copper, pour order 44): 57.86,96.82 57.955,96.725 58.06,96.62 59.15,96.62 59.27,96.74 59.27,101.19 55.28,101.19 55.27,101.18 55.26,98.98 56.088,98.152 57.86,98.152
GND on Top Layer "Top Layer-GND 6" (hatched Horizontal grid 0.102 track 0.127, remove dead copper, pour order 50): 60.16,93.54 59.84,93.86 59.84,97.87 61.57,97.88 61.57,96.82 62.25,96.14 64.68,96.14 65.1,95.72 65.1,93.54
NetC1_2 on Top Layer "Top Layer-NetC1_2" (hatched Horizontal grid 0.102 track 0.127, remove dead copper, pour order 56): 65.36,98.54 65.36,99.17 67.17,99.17 67.17,98.63 68.54,97.26 69.74,96.06 69.74,95.41 70.28,94.87 72.93,94.87 74.62,96.56 78.85,96.56 79.05,96.36 79.05,92.94 78.86,92.75 74.11,92.75 73.39,93.47 67.39,93.47 67.39,96.51
Net*3_1 on Top Layer "Top Layer-Net*3_1 3" (solid, remove dead copper, pour order 43): 57.61,83.53 57.705,83.435 57.81,83.33 58.9,83.33 59.02,83.45 59.02,87.9 55.03,87.9 55.02,87.89 55.01,85.69 55.838,84.862 57.61,84.862
GND on Top Layer "Top Layer-GND 7" (hatched Horizontal grid 0.102 track 0.127, remove dead copper, pour order 49): 59.91,80.25 59.59,80.57 59.59,84.58 61.32,84.59 61.32,83.53 62,82.85 64.43,82.85 64.85,82.43 64.85,80.25
NetC11_2 on Top Layer "Top Layer-NetC11_2" (hatched Horizontal grid 0.102 track 0.127, remove dead copper, pour order 55): 65.11,85.25 65.11,85.88 66.92,85.88 66.92,85.34 68.29,83.97 69.49,82.77 69.49,82.12 70.01,81.6 72.7,81.6 74.37,83.27 78.6,83.27 78.8,83.07 78.8,79.65 78.61,79.46 73.86,79.46 73.14,80.18 67.14,80.18 67.14,83.22
Net*3_1 on Top Layer "Top Layer-Net*3_1 4" (solid, remove dead copper, pour order 42): 57.87,70.78 57.965,70.685 58.07,70.58 59.16,70.58 59.28,70.7 59.28,75.15 55.29,75.15 55.28,75.14 55.27,72.94 56.098,72.112 57.87,72.112
GND on Top Layer "Top Layer-GND 8" (hatched Horizontal grid 0.102 track 0.127, remove dead copper, pour order 48): 60.17,67.5 59.85,67.82 59.85,71.83 61.58,71.84 61.58,70.78 62.26,70.1 64.69,70.1 65.11,69.68 65.11,67.5
NetC9_2 on Top Layer "Top Layer-NetC9_2" (hatched Horizontal grid 0.102 track 0.127, remove dead copper, pour order 54): 65.37,72.5 65.37,73.13 67.18,73.13 67.18,72.59 68.55,71.22 69.75,70.02 69.75,69.37 70.3,68.82 72.93,68.82 74.63,70.52 78.86,70.52 79.06,70.32 79.06,66.9 78.87,66.71 74.12,66.71 73.4,67.43 67.4,67.43 67.4,70.47
Net*3_1 on Top Layer "Top Layer-Net*3_1 5" (solid, remove dead copper, pour order 41): 57.988,58.38 58.083,58.285 58.188,58.18 59.278,58.18 59.398,58.3 59.398,62.75 55.408,62.75 55.398,62.74 55.388,60.54 56.216,59.712 57.988,59.712
GND on Top Layer "Top Layer-GND 9" (hatched Horizontal grid 0.102 track 0.127, remove dead copper, pour order 47): 60.288,55.1 59.968,55.42 59.968,59.43 61.698,59.44 61.698,58.38 62.378,57.7 64.808,57.7 65.228,57.28 65.228,55.1
NetC5_2 on Top Layer "Top Layer-NetC5_2" (hatched Horizontal grid 0.102 track 0.127, remove dead copper, pour order 53): 65.488,60.1 65.488,60.73 67.298,60.73 67.298,60.19 68.667,58.82 69.867,57.62 69.867,56.97 70.468,56.37 72.997,56.37 74.748,58.12 78.978,58.12 79.178,57.92 79.177,54.5 78.988,54.31 74.237,54.31 73.517,55.03 67.518,55.03 67.518,58.07
+5V_1 on Top Layer "Top Layer-+5V_1" (hatched Horizontal grid 0.102 track 0.127, remove dead copper, pour order 59): 89.654,49.716 88.534,49.716 88.11,50.14 84.607,50.14 84.164,49.696 84.164,48.606 80.164,48.606 79.504,47.946 74.654,47.946 74.664,48.336 74.664,51.586 90.184,51.586 90.184,50.246
GND on Top Layer "Top Layer-GND 10" (hatched Horizontal grid 0.102 track 0.127, remove dead copper, pour order 58): 81.204,47.066 81.204,41.636 87.704,41.636 87.874,41.806 87.874,45.89 84.52,45.89 84.184,46.226 84.184,47.066
NetC2_2 on Top Layer "Top Layer-NetC2_2" (hatched Horizontal grid 0.102 track 0.127, remove dead copper, pour order 52): 65.644,47.476 65.644,48.106 67.454,48.106 67.454,47.566 68.824,46.196 70.024,44.996 70.024,44.346 70.56,43.81 73.217,43.81 74.904,45.496 79.134,45.496 79.334,45.296 79.334,41.876 79.144,41.686 74.394,41.686 73.674,42.406 67.674,42.406 67.674,45.446
GND on Top Layer "Top Layer-GND 11" (hatched Horizontal grid 0.102 track 0.127, remove dead copper, pour order 46): 60.444,42.476 60.124,42.796 60.124,46.806 61.854,46.816 61.854,45.756 62.534,45.076 64.964,45.076 65.384,44.656 65.384,42.476
Net*3_1 on Top Layer "Top Layer-Net*3_1 6" (solid, remove dead copper, pour order 40): 58.144,45.756 58.239,45.661 58.344,45.556 59.434,45.556 59.554,45.676 59.554,50.126 55.564,50.126 55.554,50.116 55.544,47.916 56.372,47.088 58.144,47.088
GND on Bottom Layer "Bottom Layer-GND" (solid, remove dead copper, pour order 71): 35.57,40.48 cw(c35.57,42.4) 33.65,42.4 33.65,115.87 33.651,115.87 cw(c35.57,115.87) 35.57,117.79 105.37,117.79 105.371,117.79 cw(c105.371,115.87) 107.29,115.87 107.29,42.4 cw(c105.37,42.4) 105.37,40.48

## Keep-outs
Keep-Out Layer:
  lines w0.254: 33.65,115.87 33.65,42.4 ccw(c35.57,42.4) 35.57,40.48 ; 33.651,115.87 cw(c35.57,115.87) 35.57,117.79 105.37,117.79 cw(c105.371,115.87) 107.29,115.87 ; 35.57,40.48 105.37,40.48 ccw(c105.37,42.4) 107.29,42.4 107.29,115.87

## Silkscreen, mask and mechanical layers (free items; w line width, h text height)
Top Overlay:
  text "GND" at 43.95,98.02 h1.2
  text "GND" at 98.85,92.01 h1.2
  text "GND" at 48.76,68.22 h1.2
  text "OUT" at 98.9,67.17 h1.2
Mechanical 1:
  lines w0.254: 33.65,115.87 33.65,42.4 ccw(c35.57,42.4) 35.57,40.48 ; 33.651,115.87 cw(c35.57,115.87) 35.57,117.79 105.37,117.79 cw(c105.371,115.87) 107.29,115.87 ; 35.57,40.48 105.37,40.48 ccw(c105.37,42.4) 107.29,42.4 107.29,115.87

## Text inside footprints (layer, text, board x,y; h text height)
JP3: Top Overlay "-" at 47.677,71.888 h0.8 r90; Top Overlay "+" at 47.931,82.937 h0.8 r90